# Altium PCB SDcard.PcbDoc
Units mm, origin at the board's own origin, x right, y up, seen from the top; angles counter-clockwise.
Board outline 142.3 x 53.6 mm, 2 copper layers (Top Layer, Bottom Layer); 28 components, 38 nets, 87 pads, 9 vias.
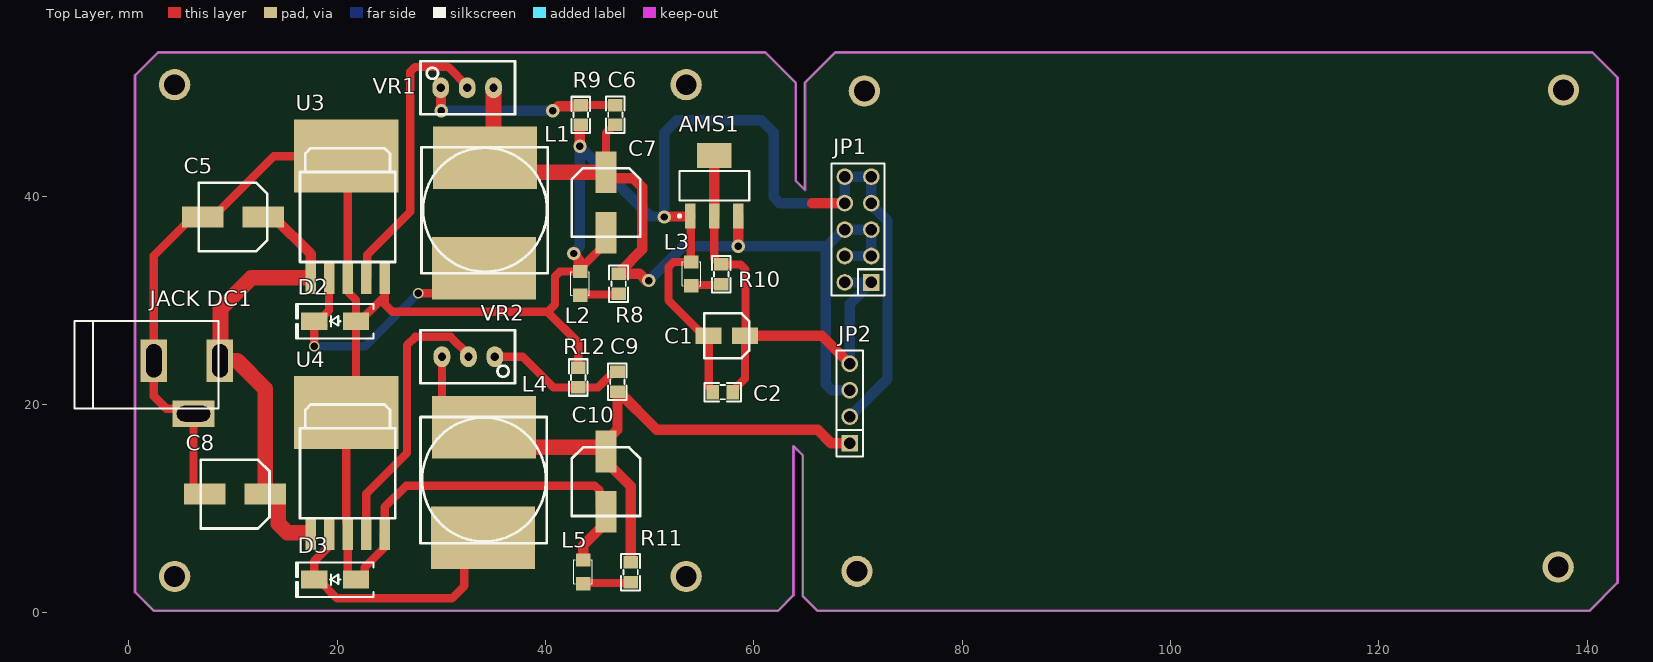
[diagram p0: Top Layer view]
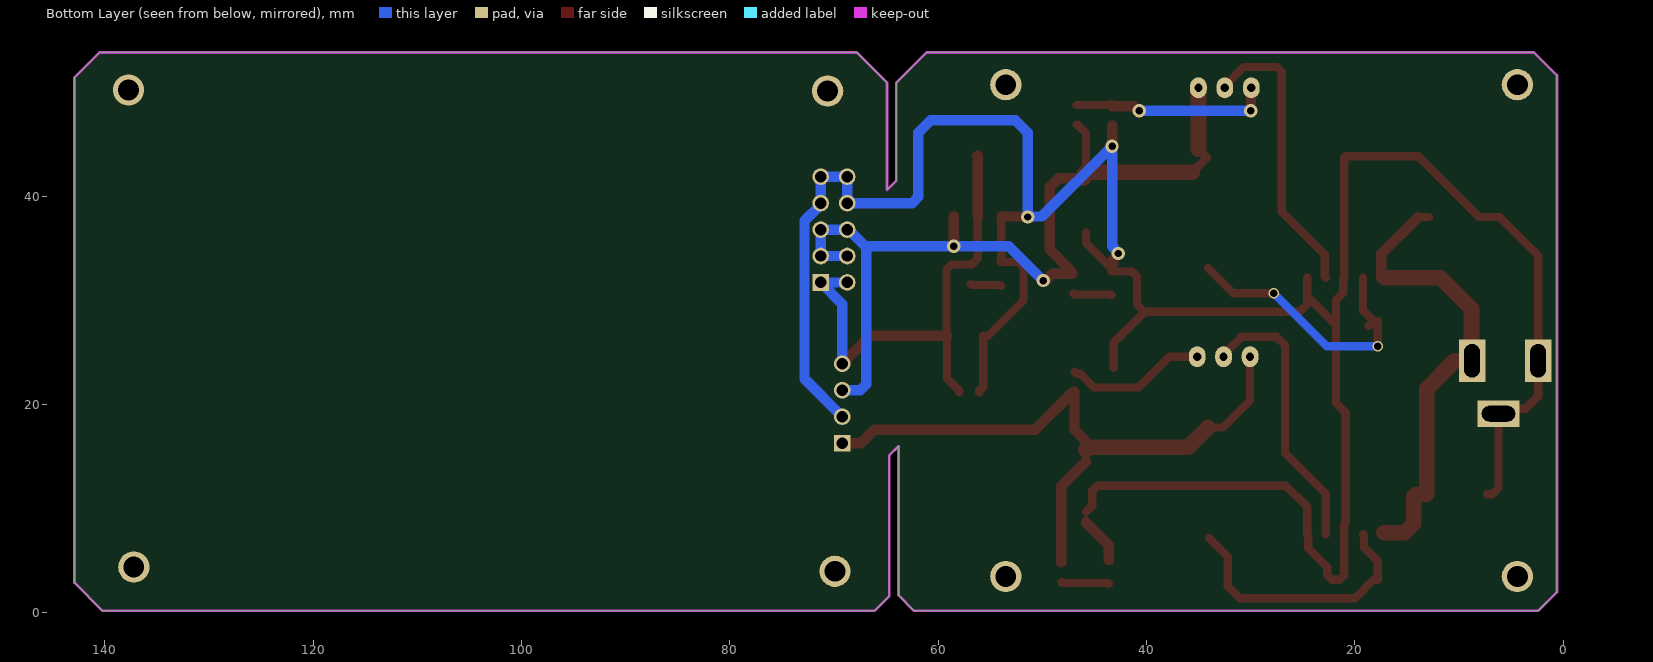
[diagram p1: Bottom Layer view, seen from below]
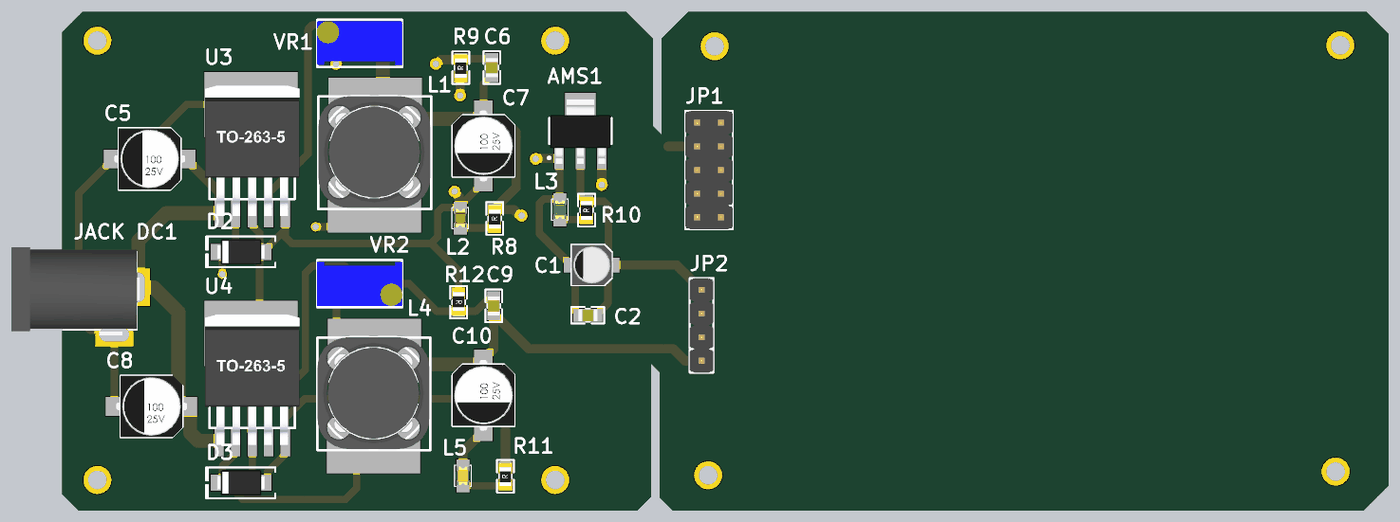
[diagram p2: 3D render of the assembled board from above, using the file's embedded part models]

## Layer stack, top to bottom
Top Solder: solder mask 0.0102, Solder Resist, Dk 3.5
Top Layer: signal copper 0.0356
Dielectric 1: dielectric 0.32, FR-4, Dk 4.8
Bottom Layer: signal copper 0.0356
Bottom Solder: solder mask 0.0102, Solder Resist, Dk 3.5

## Board outline
0.6,2 2.4,0.2 62.3,0.2 63.8,1.7 63.8,16 64.7,15.1 64.7,1.6 66.1,0.2 140.2,0.2 142.9,2.9 142.9,51.4 140.5,53.8 67.8,53.8 64.9,50.9 64.9,40.6 64,41.5 64,50.9 61.1,53.8 2.8,53.8 0.6,51.6

## Design rules (kind name [scope] priority, off if disabled: settings)
Clearance [All] p1: gap=0.254 ignorepadtopadclearanceinfootprint=FALSE except(0: Arc-Hole Track-Hole SMDPad-Hole THPad-Hole Via-Hole Fill-Hole Poly-Hole Region-Hole Text-Hole)
DiffPairsRouting [All] p1: maxlimit=0.254 minlimit=0.1 mostfreqgap=0.254 toplayer_minwidth=0.381 toplayer_maxwidth=0.381 toplayer_prefwidth=0.381 bottomlayer_minwidth=0.381 bottomlayer_maxwidth=0.381 bottomlayer_prefwidth=0.381 maxuncoupledlength=12.7
PolygonConnect [All] p1: connectstyle=Relief reliefconductorwidth=0.254 reliefentries=4 polygonreliefangle="90 Angle" airgapwidth=0.254
RoutingVias [All] p1: holewidth=0.4 width=0.8 viastyle="Through Hole" minholewidth=0.3 minwidth=0.5 maxholewidth=0.711 maxwidth=1.27
SolderMaskExpansion [All] p1: expansion=0.102 istentingtop=FALSE
Width [All] p1: maxlimit=5 minlimit=0.1 preferedwidth=1
29 further rules are at their usual default settings.

## Components (designator, comment, footprint, x,y, rotation, side; value= is the part's Value field where it differs from the comment)
AMS1 "AMS1117-3.3V" SOT223 56.2,41 r0 top value="AMS1117-3.3V SOT223"
C1 "1uF" "tu nhom 4 (B)" 57.4,26.6 r180 top
C2 "104" "tu 0805" 57,21.2 r0 top
C5 "220uF" "tu nhom 6.3 (d)" 10,38 r180 top
C6 "33pF" "tu 0805" 46.7,47.8 r90 top
C7 "220uF" "tu nhom 6.3 (d)" 45.804,39.4 r270 top
C8 "220uF" "tu nhom 6.3 (d)" 10.2,11.4 r180 top
C9 "33pF" "tu 0805" 46.9,22.2 r90 top
C10 "220uF" "tu nhom 6.3 (d)" 45.804,12.6 r270 top
D2 "SS14" "DIODE SMA" 19.8,28 r180 top
D3 "SS14" "DIODE SMA" 19.8,3.2 r180 top
"JACK DC1" "JACK DC 5.5" "JACK DC 5.5" 5.575,21.66 r0 top value="Jac DC"
JP1 "Comment" "JP 2x5 DT" 70,36.8 r90 top
JP2 "Comment" "JP 1x4 DT" 69.2,16.3 r90 top
L1 "100uH - 3A SMD" "Cuon Cam 12x12x10" 40.2,44.7 r180 top
L2 "LED 0805" LED-0805-Red 43.317,30.487 r90 top
L3 "LED 0805" LED-0805-Green 54,31.4 r90 top
L4 "100uH - 3A SMD" "Cuon Cam 12x12x10" 40.1,18.8 r180 top
L5 "LED 0805" LED-0805-Orange 43.6,2.8 r90 top
R8 "10k" "tro smd 0805" 46.949,31.6 r90 top
R9 "510k" "tro smd 0805" 43.316,47.797 r90 top
R10 "1k" "tro smd 0805" 56.8,32.5 r90 top
R11 "10k" "tro smd 0805" 48.1,3.9 r90 top
R12 "510k" "tro smd 0805" 43.2,22.597 r270 top
U3 "LM2576HVS ADJ SMD" TO263-5 21,38 r0 top
U4 "LM2576HVS ADJ SMD" TO263-5 21,13.4 r0 top
VR1 "1K" "Bien Tro Vi Chinh Dung" 32.47,50.4 r0 top
VR2 "1K" "Bien Tro Vi Chinh Dung" 32.597,24.6 r180 top

## Footprints (in the part's own frame and the unit in brackets; to place one, negate y for a bottom-side part, rotate by r counter-clockwise, add the part's x,y. Pads: shape width x height; smd on the part's side, far side on the other; paste and mask are expansions set on the pad)
"Bien Tro Vi Chinh Dung" [mm] "Bien tro vi chinh"
  oval 1.6x2 hole 0.8: 1(-2.54,0) 2(0,0) 3(2.54,0)
  silkscreen extent -4.47,-2.54 4.6,2.54, body extent -4.54,-2.4 4.66,2.4, height 12.02
"Cuon Cam 12x12x10" [mm] "Cuon Cam 12x12x10"
  rect 10x6 smd: 1(6.1,11.6) 2(6,1)
  silkscreen extent 0,0 12.1,12.1, body extent 0.1,-0.2 12.1,12.14, height 7.51
"DIODE SMA" [mm] "SMA"
  rect 2.5x1.7 smd: 1(-2,0) 2(2,0)
  silkscreen extent -3.68,-1.65 3.75,1.65, body extent -2.6,-1.37 2.6,1.37, height 2.4
"JACK DC 5.5" [mm] "Jac DC input"
  rect 2.54x4.064 hole 1.5 slot 3.2 at 90 deg: 1(3.175,2.54) 2(-3.175,2.54)
  rect 4.064x2.54 hole 1.5 slot 3.2 at 0 deg: 3(0.635,-2.54)
  silkscreen extent -10.79,-2.03 3.05,6.35, body extent -10.42,-2.67 3.4,6.84, height 11.02
"JP 1x4 DT" [mm] "4 pins, 1 row, straight, gold plating"
  rect 1.6x1.6 hole 1.1: 1(0,0)
  round 1.6 hole 1.1: 2(2.54,0) 3(5.08,0) 4(7.62,0)
  silkscreen extent -1.27,-1.27 8.89,1.27, body extent -1.27,-1.27 8.89,1.27, height 8.54
"JP 2x5 DT" [mm] "10 pins, dual pin, straight, gold plating"
  rect 1.6x1.6 hole 1.1: 1(-5.08,-1.27)
  round 1.6 hole 1.1: 2(-2.54,-1.27) 3(0,-1.27) 4(2.54,-1.27) 5(5.08,-1.27) 6(5.08,1.27) 7(2.54,1.27) 8(0,1.27) 9(-2.54,1.27) 10(-5.08,1.27)
  silkscreen extent -6.35,-2.54 6.35,2.54, body extent -6.35,-2.54 6.35,2.54, height 8.55
LED-0805-Green [mil]
  rect 50x55 smd: 1(0,0) 2(90,0)
  silkscreen extent 0,-35 90,35, body extent 5,-25 85,25, height 43
LED-0805-Orange [mil]
  rect 50x55 smd: 1(0,0) 2(90,0)
  silkscreen extent 0,-35 90,35, body extent 5,-25 85,25, height 43
LED-0805-Red [mil]
  rect 50x55 smd: 1(0,0) 2(90,0)
  silkscreen extent 0,-35 90,35, body extent 5,-25 85,25, height 43
SOT223 [mm]
  rect 1x2.4 smd: 1(-2.3,-2.9) 2(0,-2.9) 3(2.3,-2.9)
  rect 3.3x2.4 smd: 4(0,2.9)
  silkscreen extent -3.47,-3.02 3.35,1.4, body extent -3.25,-3.56 3.25,3.4, height 1.68
TO263-5 [mil] "TO263-5"
  rect 39.37x120 smd: 1(-140,-230) 2(-70,-230) 3(0,-230) 4(70,-230) 5(140,-230)
  rect 393.7x275.59 smd: 6(-5,230)
  silkscreen extent -180,-170 180,260, body extent -200,-242 200,310, height 180
"tro smd 0805" [mm]
  rect 1.2x1.4 smd: 1(-0.946,-0.061) 2(0.954,-0.061)
  silkscreen extent -1.75,-0.97 1.75,0.84, body extent -1.56,-0.76 1.44,0.64, height 0.53
"tu 0805" [mm] "Compoment SMD 80x50mil"
  rect 1.2x1.4 smd: 1(-0.946,-0.003) 2(0.954,-0.003)
  silkscreen extent -1.75,-0.89 1.75,0.89, body extent -1.01,-0.64 1.01,0.63, height 0.61
"tu nhom 4 (B)" [mm]
  rect 2.5x1.6 smd: 1(-1.75,0) 2(1.75,0)
  silkscreen extent -2.15,-2.15 2.15,2.15, body extent -2.31,-2.15 2.29,2.15, height 3.91
"tu nhom 6.3 (d)" [mm]
  rect 4x2 smd: 1(-2.9,0) 2(2.9,0)
  silkscreen extent -3.3,-3.3 3.3,3.3, body extent -3.8,-3.3 3.8,3.3, height 8

## Part data
AMS1: library part "AMS1117 SMD", "Dán", Chung_Loai=Dán, Don_Vi=Con, Ma_Hang=MH000596
C1: library part "Tu Nhom 1uF 50V", "Dán", Chung_Loai=Dán, Don_Vi=Con, Ma_Hang=MH007467, So_Chan=2, Ten_Linh_Kien="Tụ Nhôm 1uF 50V 4x5.4MM"
C2: library part "Tu 0805 104 50V 10%", "Dán", Chung_Loai=Dán, Don_Vi=Con, Ma_Hang=MH004551, So_Chan=2, Ten_Linh_Kien="Tụ 0805 104-100nF 10% 50V"
C5 C7 C8 C10: library part "Tu Nhom 220uF 16V", "Dán", Chung_Loai=Dán, Don_Vi=Con, Ma_Hang=MH002227, So_Chan=2, Ten_Linh_Kien="Tụ Nhôm 220uF 16V 6.3x7.7MM"
C6 C9: library part "Tu 0805 33pF 50V 10%", "Dán", Chung_Loai=Dán, Don_Vi=Con, Ma_Hang=MH004563, So_Chan=2, Ten_Linh_Kien="Tụ 0805 33p 10% 50V"
D2 D3: library part "Diode SS14 ( 1N5819)", "Dán", Chung_Loai=Dán, Don_Vi=Con, Ma_Hang=MH002211, Ten_Linh_Kien="Diode SS14 DO214 Schottky 1A 40V ( 1N5819 DO214)"
JP1: library part "JP 2x8 2.54 Duc Thang", "Cắm"
L1 L4: library part "CUON CAM 100uH SMD", "Dán", Chung_Loai=Dán, Don_Vi=Con, Ten_Linh_Kien="Cuộn Cảm 100uH 7x7x4MM CD74"
L2: library part "LED 0805 Do", "Dán", Chung_Loai=Dán, Don_Vi=Con, Ma_Hang=MH000897, Ten_Linh_Kien="LED 0805 Màu Đỏ (Red)"
L3: library part "LED 0805 Xanh La", "Dán", Chung_Loai=Dán, Don_Vi=Con, Ma_Hang=MH002326, Ten_Linh_Kien="LED 0805 Màu Xanh Lá (Green)"
L5: library part "LED 0805 Cam", "Dán", Chung_Loai=Dán, Don_Vi=Con, Ma_Hang=MH002328, Ten_Linh_Kien="LED 0805 Màu Cam ( Orange)"
R8 R11: library part "Tro 0805 1% 10k", "Dán", Chung_Loai=Dán, Don_Vi=Con, Ma_Hang=MH005473, So_Chan=2, Ten_Linh_Kien="Trở 0805 1% 10k"
R9 R12: library part "Tro 0805 1% 510k", "Dán", Chung_Loai=Dán, Don_Vi=Con, Ma_Hang=MH005486, So_Chan=2, Ten_Linh_Kien="Trở 0805 1% 510k"
R10: library part "Tro 0805 5% 1k", "Dán", Chung_Loai=Dán, Don_Vi=Con, Ma_Hang=MH005234, So_Chan=2, Ten_Linh_Kien="Trở 0805 5% 1k"
U3 U4: "Dán", Chung_Loai=Dán, Don_Vi=Con, Ma_Hang=MH002361, Ten_Linh_Kien="LM2576HVS-ADJ BUCK ADJ 3A TO263-5"
VR1 VR2: library part "Bien Tro Tinh Chinh 1K Dung", "Cắm", Chung_Loai=Cắm, Don_Vi=Con, Ma_Hang=MH003234, Ten_Linh_Kien="Biến Trở VR 102-1K 3296W"

## Free pads (board coordinates)
  round 3 hole 2: 4(53.5,50.7) 4(69.9,4) 4(70.6,50.1) 4(137.2,4.4) 4(137.7,50.2) 5(53.5,3.5) 6(4.4,3.5) 7(4.4,50.7)

## Via types
v1: diameter 1.27, hole 0.711, Top Layer to Bottom Layer, 7 vias
v2: diameter 1, hole 0.711, Top Layer to Bottom Layer, 2 vias

## Nets (pads, with @x,y where several pads share a name; then routed paths per layer and width w, separated by ;. In a path a pad name is that pad's centre, name@x,y a point inside that pad or via, vN(x,y) a via of type N, cw(c..) or ccw(c..) an arc to the next point about the centre after c; other vN are vias at no path point)
3.3V: AMS1.2 AMS1.4 C1.1 C2.2 JP1.1 JP1.10 JP2.4 R10.2 | length 48.5
  Top Layer w0.3: AMS1.4 AMS1.4@56.65,43.9 ; C2.2@57.9,21.142 C2.2
  Top Layer w0.8: AMS1.2 56.2,34.015 56.761,33.454 R10.2 56.876,33.439 58.731,33.439 59.2,32.971 59.2,26.65 C1.1 59.15,22.492 57.954,21.297 C2.2
  Top Layer w1: AMS1.2 AMS1.4 ; C1.1 66.52,26.6 JP2.4
  Bottom Layer w1: JP1.10 JP1.1 69.2,29.65 JP2.4
32K: 
+5: AMS1.3 C6.1 C7.1 JP1.2 JP1.3 JP1.8 JP1.9 JP2.3 L1.2 R8.2 VR1.3 | length 88
  Top Layer w0.3: R8.2 R8.2@47.11,32.554 ; v1@49.674,31.9 v1(49.9,31.9)
  Top Layer w0.8: L1.2@35.01,44.51 L1.2 L1.2@35.6,42.3 ; C7.1@46.004,42.1 C7.1 45.804,46.055 46.603,46.854 C6.1
  Top Layer w1: C7.1@46.054,41.724 48.421,41.724 49.3,40.846 49.3,34.9 47.21,32.81 47.21,32.654 47.11,32.554 49.02,32.554 v1@49.674,31.9 ; v1(58.5,35.2) AMS1.3
  Top Layer w1.5: L1.2@35.01,44.51 VR1.3 ; L1.2@35.6,42.3 C7.1 ; C7.1@46.004,42.1 46.004,41.774 C7.1@46.054,41.724
  Bottom Layer w1: v1(49.9,31.9) 53.2,35.2 v1(58.5,35.2) 66.974,35.2 68.574,36.8 JP1.8 JP1.3 JP1.2 JP1.9 ; 66.9,35.2 66.9,21.966 67.486,21.38 JP2.3
+5_SIM: C9.1 C10.1 JP2.1 L4.2 R11.2 VR2.3 | length 64.1
  Top Layer w0.8: VR2.3 30.057,20.4 32.657,17.8 L4.2 ; C10.1@45.804,14.5 C10.1 45.804,15.65 C10.1@45.804,16.5
  Top Layer w1: C10.1@45.804,14.5 48.161,12.144 R11.2 ; C10.1@45.804,16.5 46.903,17.599 C9.1 47.003,21.254 50.672,17.586 66.114,17.586 67.4,16.3 JP2.1
  Top Layer w1.5: L4.2 36,15.9 45.554,15.9 C10.1@45.804,15.65
CS: 
CS_LLS: 
DC_IN: "JACK DC1.1" C5.1 C8.1 U3.1 U4.1 | length 45.6
  Top Layer w0.8: C5.1 C5.1@13.9,38 ; C8.1 C8.1@13.2,11.4
  Top Layer w1: C5.1@13.9,38 17.444,34.456 U3.1
  Top Layer w1.5: C8.1 13.1,21.5 10.4,24.2 8.75,24.2 8.8,24.25 8.8,29.2 11.758,32.158 U3.1@17.1,32.158 ; C8.1@13.2,11.4 14.1,11.4 14.35,11.15 14.35,8.579 15.229,7.7 U4.1@17.194,7.7
DI_LLS: 
DO_LLS: 
GND: "JACK DC1.2" "JACK DC1.3" AMS1.1 C1.2 C2.1 C5.2 C7.2 C8.2 C10.2 D2.1 D3.1 JP1.4 JP1.5 JP1.6 JP1.7 JP2.2 L2.2 L3.2 L5.2 R9.1 R12.1 U3.3 U3.5 U3.6 U4.3 U4.5 U4.6 | length 282.6
  Top Layer w0.3: R9.1@43.3,46.775 R9.1 ; L5.2@43.314,4.8 L5.2 ; C10.2@45.804,8.7 C10.2
  Top Layer w0.8: C8.2 6.81,11.4 6.21,12 6.21,19.12 5.73,19.6 3.6,19.6 2.4,20.8 2.4,24.2 2.4,34.3 6.1,38 C5.2 8.1,38 13.942,43.842 U3.6 21,43.715 U3.3 21.1,32.058 21.1,30.75 21.8,30.05 D2.1 ; D3.1@21.45,3.2 21,3.65 U4.3 21,8.582 20.873,8.709 U4.6 21.8,20.169 D2.1 ; D3.1 22.2,3.2 22.65,3.65 22.65,4.4 24.456,6.206 24.456,7.458 U4.5 24.556,10.156 26.6,12.2 44.736,12.2 45.204,11.731 45.204,10.3 C10.2 ; 24.456,30.256 22.2,28 D2.1 ; U3.5 24.556,29.644 25.3,28.9 40.2,28.9 ; R12.1 43.139,25.961 40.2,28.9 ; L2.2 41.369,32.773 40.9,32.304 40.9,29.6 40.2,28.9 ; L2.2@43.616,33.311 45.804,35.5 C7.2 ; AMS1.1 53.95,38.05 53.95,33.736 L3.2 52.269,33.686 51.8,33.217 51.8,30 55.2,26.6 C1.2 55.65,21.701 56.054,21.297 C2.1
  Top Layer w1: v1(42.7,34.5) 42.7,34.427 43.2,33.927 43.2,33.5 ; v1(43.3,44.8) R9.1@43.3,46.775 ; L5.2 43.6,6.496 C10.2@45.804,8.7 ; v1(51.4,38) 51.45,38.05 53.9,38.05 AMS1.1 ; 65.608,39.34 JP1.7 ; JP2.2 JP2.2@69.315,18.725 ; JP1.5 JP1.5@71.385,41.765
  Bottom Layer w1: v1(42.7,34.5) 42.7,34.573 43.3,35.173 v1(43.3,44.8) 50.048,38.052 51.348,38.052 v1(51.4,38) 51.4,46.1 52.6,47.3 60.7,47.3 61.9,46.1 61.9,39.926 62.486,39.34 JP1.7 JP1.6 JP1.5 JP1.4 71.27,39.195 72.824,37.641 72.824,22.464 JP2.2
MISO: 
MOSI: 
NetC6_2: C6.2 R9.2 VR1.1 | length 19.2
  Top Layer w0.8: R9.2 43.378,48.753 46.702,48.753 C6.2
  Top Layer w1: VR1.1 29.965,50.365 29.965,48.235 v1(30,48.2) ; v1(40.7,48.2) 40.773,48.2 41.225,48.652 43.276,48.652 R9.2
  Bottom Layer w1: v1(30,48.2) v1(40.7,48.2)
NetC9_2: C9.2 R12.2 VR2.1 | length 13.6
  Top Layer w0.8: VR2.1 37.795,24.6 40.752,21.643 R12.2 45.039,21.643 46.351,22.954 46.703,22.954 C9.2
NetD1_1: 
NetD1_2: 
NetD2_2: D2.2 L1.1 U3.2 | length 27.4
  Top Layer w0.8: v2(17.8,25.6) D2.2 D2.2@18.2,28 ; D2.2@18.65,27.55 D2.2@18.2,28 ; U3.2 19.222,29.022 D2.2@18.2,28 ; v2(27.8,30.7) 31.7,30.7 L1.1
  Bottom Layer w0.8: v2(17.8,25.6) 22.7,25.6 v2(27.8,30.7)
NetD3_2: D3.2 L4.1 U4.2 | length 25.9
  Top Layer w0.8: U4.2 19.122,7.458 19.122,6.287 17.8,4.965 D3.2 18.2,3.2 20,1.4 31,1.4 32.2,2.6 32.2,5.4 L4.1
NetIC1_1: 
NetIC1_2: 
NetIC1_3: 
NetIC1_5: 
NetIC1_6: 
NetIC1_8: 
NetIC2_2: 
NetIC2_5: 
NetIC2_9: 
NetIC2_12: 
NetL2_1: L2.1 R8.1 | length 3.8
  Top Layer w0.8: L2.1 43.401,30.571 46.926,30.571 R8.1
NetL3_1: L3.1 R10.1 | length 2.9
  Top Layer w0.8: L3.1 54.077,31.477 56.784,31.477 R10.1
NetL5_1: L5.1 R11.1 | length 4.6
  Top Layer w0.8: L5.1 43.677,2.877 48.084,2.877 R11.1
NetU3_4: U3.4 VR1.2 | length 28.1
  Top Layer w0.8: U3.4 22.878,32.258 22.878,34.378 27,38.5 27,51.931 27.469,52.4 30.67,52.4 32.47,50.6 VR1.2
NetU4_4: U4.4 VR2.2 | length 26.9
  Top Layer w0.8: U4.4 22.778,11.43 26.7,15.352 26.7,25.7 27.5,26.5 30.897,26.5 32.597,24.8 VR2.2
SCK: 
SCK_LLS: 
SCL: 
SDA: 
SQW: 

## Keep-outs
Keep-Out Layer:
  lines w0.254: 0.6,51.6 2.8,53.8 61.1,53.8 64,50.9 64,41.5 64.9,40.6 64.9,50.9 67.8,53.8 140.5,53.8 142.9,51.4 142.9,2.9 140.2,0.2 66.1,0.2 64.7,1.6 64.7,15.1 63.8,16 63.8,5.6 63.8,1.7 62.3,0.2 56,0.2 2.4,0.2 0.6,2 0.6,51.6 ; 0.6,51.6 0.6,51.6